# EAGLE board CT_schematic (EAGLE 7.6.0)

Size 100 x 80 mm. Coordinates in mm from the lower left corner, seen from the top.
Outline: 0,0 100,0 100,80 0,80 0,0
Copper layers (1*16): Top 0.035mm / dielectric 1.5mm / Bottom 0.035mm
Design rules "default": minimum track width 10mil, minimum drill 24mil, track to track 8mil, track to pad 8mil, pad to pad 8mil, via to via 8mil, smd to smd 8mil, copper to edge 40mil, drill to drill 8mil, minimum pad ring 10mil, minimum via ring 8mil, stop-mask expansion 4mil, vias tented up to drill 0mil, thermal gap 10mil

## Footprints (pad centres in the part's own frame; a part is rotated, then mirrored left to right if it is on the bottom)
C0603 = smd 0.8 x 0.8: 1 -0.762,0; 2 0.762,0
C0402 = smd 0.5 x 0.5: 1 -0.508,0; 2 0.508,0
C1210 = smd 1.2 x 2.5: 1 -1.524,0; 2 1.524,0
C0805 = smd 1.2 x 1.3: 1 -1.016,0; 2 1.016,0
C1206 = smd 1.3 x 1.6: 1 -1.524,0; 2 1.524,0
EXV-9H = smd 3.505 x 1.676: 1 -2.857,0; 2 2.857,0
L0603 = smd 0.8 x 0.8: 1 -0.762,0; 2 0.762,0
PJ-037B_PACKAGE = drill 3.7 square: 1 12,0 | drill 3.2 square: 2 6,0
R0603 = smd 0.8 x 0.8: 1 -0.762,0; 2 0.762,0
LQFP64 = smd 0.3 x 1.2: 1 -3.75,-5.75; 2 -3.25,-5.75; 3 -2.75,-5.75; 4 -2.25,-5.75; 5 -1.75,-5.75; 6 -1.25,-5.75; 7 -0.75,-5.75; 8 -0.25,-5.75; 9 0.25,-5.75; 10 0.75,-5.75; 11 1.25,-5.75; 12 1.75,-5.75; 13 2.25,-5.75; 14 2.75,-5.75; 15 3.25,-5.75; 16 3.75,-5.75; 33 3.75,5.75; 34 3.25,5.75; 35 2.75,5.75; 36 2.25,5.75; 37 1.75,5.75; 38 1.25,5.75; 39 0.75,5.75; 40 0.25,5.75; 41 -0.25,5.75; 42 -0.75,5.75; 43 -1.25,5.75; 44 -1.75,5.75; 45 -2.25,5.75; 46 -2.75,5.75; 47 -3.25,5.75; 48 -3.75,5.75 | smd 1.2 x 0.3: 17 5.75,-3.75; 18 5.75,-3.25; 19 5.75,-2.75; 20 5.75,-2.25; 21 5.75,-1.75; 22 5.75,-1.25; 23 5.75,-0.75; 24 5.75,-0.25; 25 5.75,0.25; 26 5.75,0.75; 27 5.75,1.25; 28 5.75,1.75; 29 5.75,2.25; 30 5.75,2.75; 31 5.75,3.25; 32 5.75,3.75; 49 -5.75,3.75; 50 -5.75,3.25; 51 -5.75,2.75; 52 -5.75,2.25; 53 -5.75,1.75; 54 -5.75,1.25; 55 -5.75,0.75; 56 -5.75,0.25; 57 -5.75,-0.25; 58 -5.75,-0.75; 59 -5.75,-1.25; 60 -5.75,-1.75; 61 -5.75,-2.25; 62 -5.75,-2.75; 63 -5.75,-3.25; 64 -5.75,-3.75
TST-110-05-T-D-RA = drill 1 pad 1.7 square: 1 0,0 | drill 1 pad 1.7: 2 0,2.54; 3 2.54,0; 4 2.54,2.54; 5 5.08,0; 6 5.08,2.54; 7 7.62,0; 8 7.62,2.54; 9 10.16,0; 10 10.16,2.54; 11 12.7,0; 12 12.7,2.54; 13 15.24,0; 14 15.24,2.54; 15 17.78,0; 16 17.78,2.54; 17 20.32,0; 18 20.32,2.54; 19 22.86,0; 20 22.86,2.54
QFN-28 = smd 0.813 x 0.305: 1 -2.451,1.5; 2 -2.451,1; 3 -2.451,0.5; 4 -2.451,0; 5 -2.451,-0.5; 6 -2.451,-1; 7 -2.451,-1.5; 15 2.451,-1.5; 16 2.451,-1; 17 2.451,-0.5; 18 2.451,0; 19 2.451,0.5; 20 2.451,1; 21 2.451,1.5 | smd 0.305 x 0.813: 8 -1.5,-2.451; 9 -1,-2.451; 10 -0.5,-2.451; 11 0,-2.451; 12 0.5,-2.451; 13 1,-2.451; 14 1.5,-2.451; 22 1.5,2.451; 23 1,2.451; 24 0.5,2.451; 25 0,2.451; 26 -0.5,2.451; 27 -1,2.451; 28 -1.5,2.451 | smd 3.607 x 3.607: 29 0,0
SJ-43515TS-SMT-TR = smd 2.2 x 3: 1 0.6,-7.4; 4 3.4,-7.4 | smd 3 x 3: 2 12.8,-7.4; 5 17,-3 | smd 2 x 3: 3 5.3,0; 6 2.5,0 | drill 1.8: P$7 4.5,-3.69; P$8 11.54,-3.69
ASEK = smd 1.4 x 1: 1 -1.1,-0.8; 2 1.1,-0.8; 3 1.1,0.8; 4 -1.1,0.8
ASFL1 = smd 1.7 x 1.5: 1 -1.27,-1.1; 2 1.27,-1.1; 3 1.27,1.1; 4 -1.27,1.1
WSON-8 = smd 0.3 x 0.6: 1 -0.75,0; 2 0.05,0; 3 0.85,0; 4 1.65,0; 5 1.65,3.8; 6 0.85,3.8; 7 0.05,3.8; 8 -0.75,3.8 | smd 3 x 2.6: PAD 0.45,1.9
SON-6 = smd 0.55 x 0.3: 1 -0.355,0.5 | smd 0.52 x 0.3: 2 -0.37,0; 3 -0.37,-0.5; 4 0.37,-0.5; 5 0.37,0; 6 0.37,0.5
SW_4-1437565-2 = smd 1.4 x 2.1: 1 -2.23,4.55; 2 -2.23,-4.55; 3 2.23,4.55; 4 2.23,-4.55
LGM67K-G1J2-24-Z = smd 0.8 x 1.4: A -2,0; C 0,0
NC7SZ125M5X = smd 1.3 x 0.7: 1 -1.3,0.95; 2 -1.3,0; 3 -1.3,-0.95; 4 1.3,-0.95; 5 1.3,0.95
DUMMY_PACKAGE_145 = drill 0.3: 1 0,-1; 2 1.5,-1; 3 3,-1

## Placement (x,y rotation side)
C1  1e-06  [C0603]  -53.34,62.23 0 top  (outside the outline)
C2  1e-07  [C0603]  -57.15,62.23 0 top  (outside the outline)
C3  1e-07  [C0603]  -60.96,62.23 0 top  (outside the outline)
C4  1e-07  [C0603]  -64.77,62.23 0 top  (outside the outline)
C5  1e-07  [C0603]  -68.58,62.23 0 top  (outside the outline)
C6  1e-07  [C0603]  -72.39,62.23 0 top  (outside the outline)
C7  4.7e-06  [C0603]  -49.53,62.23 0 top  (outside the outline)
C8  1e-08  [C0603]  -15.24,67.31 0 top  (outside the outline)
C9  1e-06  [C0603]  -19.05,67.31 0 top  (outside the outline)
C10  1e-07  [C0402]  -49.53,67.31 0 top  (outside the outline)
C11  2.2e-05  [C1210]  -59.69,49.53 0 top  (outside the outline)
C12  2.2e-05  [C1210]  -66.04,49.53 0 top  (outside the outline)
C13  1e-09  [C0402]  -53.34,67.31 0 top  (outside the outline)
C14  1e-09  [C0402]  -57.15,67.31 0 top  (outside the outline)
C15  1e-07  [C0402]  -60.96,67.31 0 top  (outside the outline)
C16  1e-07  [C0402]  -64.77,67.31 0 top  (outside the outline)
C17  1e-07  [C0402]  -68.58,67.31 0 top  (outside the outline)
C18  1e-07  [C0402]  -72.39,67.31 0 top  (outside the outline)
C19  1e-07  [C0402]  -15.24,72.39 0 top  (outside the outline)
C20  1e-05  [C0805]  -34.29,55.88 0 top  (outside the outline)
C21  1e-05  [C0805]  -39.37,55.88 0 top  (outside the outline)
C22  1e-05  [C0805]  -44.45,55.88 0 top  (outside the outline)
C23  1e-05  [C0805]  -49.53,55.88 0 top  (outside the outline)
C24  1e-05  [C0805]  -54.61,55.88 0 top  (outside the outline)
C25  1e-08  [C0402]  -19.05,72.39 0 top  (outside the outline)
C26  1e-08  [C0402]  -22.86,72.39 0 top  (outside the outline)
C27  1e-08  [C0402]  -26.67,72.39 0 top  (outside the outline)
C28  1e-08  [C0402]  -30.48,72.39 0 top  (outside the outline)
C29  1e-05  [C1206]  -16.51,55.88 0 top  (outside the outline)
C30  1e-05  [C1210]  -72.39,49.53 0 top  (outside the outline)
C31  1e-07  [C0402]  -34.29,72.39 0 top  (outside the outline)
C32  0.0001  [EXV-9H]  -17.78,49.53 0 top  (outside the outline)
C33  0.0001  [EXV-9H]  -29.21,49.53 0 top  (outside the outline)
C34  1e-08  [C0402]  -38.1,72.39 0 top  (outside the outline)
C35  1e-08  [C0402]  -41.91,72.39 0 top  (outside the outline)
F1  240.0  [L0603]  -22.86,67.31 0 top  (outside the outline)
J1  PJ-037B  [PJ-037B_PACKAGE]  -27.94,21.59 0 top  (outside the outline)
R2  1000.0  [R0603]  -26.67,67.31 0 top  (outside the outline)
R4  4700.0  [R0603]  -30.48,67.31 0 top  (outside the outline)
R5  10000.0  [R0603]  -15.24,62.23 0 top  (outside the outline)
R6  10000.0  [R0603]  -20.32,62.23 0 top  (outside the outline)
R7  47000.0  [R0603]  -25.4,62.23 0 top  (outside the outline)
R8  47000.0  [R0603]  -30.48,62.23 0 top  (outside the outline)
R9  47000.0  [R0603]  -35.56,62.23 0 top  (outside the outline)
R10  680.0  [R0603]  -34.29,67.31 0 top  (outside the outline)
R11  100000.0  [R0603]  -59.69,55.88 0 top  (outside the outline)
R12  2231.0  [R0603]  -38.1,67.31 0 top  (outside the outline)
R13  1000.0  [R0603]  -41.91,67.31 0 top  (outside the outline)
R14  10000.0  [R0603]  -40.64,62.23 0 top  (outside the outline)
R15  10000.0  [R0603]  -45.72,62.23 0 top  (outside the outline)
R16  9100.0  [R0603]  -45.72,67.31 0 top  (outside the outline)
R17  680000.0  [R0603]  -64.77,55.88 0 top  (outside the outline)
R18  120000.0  [R0603]  -69.85,55.88 0 top  (outside the outline)
U1  STM32F373RBT6  [LQFP64]  -40.64,21.59 0 top  (outside the outline)
U2  TST-110-05-T-D-RA  [TST-110-05-T-D-RA]  -46.99,39.37 0 top  (outside the outline)
U3  WM8731CLSEFL  [QFN-28]  -52.07,49.53 0 top  (outside the outline)
U4  SJ-43515TS-SMT-TR  [SJ-43515TS-SMT-TR]  -39.37,10.16 0 top  (outside the outline)
U5  SJ-43515TS-SMT-TR  [SJ-43515TS-SMT-TR]  -67.31,10.16 0 top  (outside the outline)
U6  ASEK-32.768KHz-ECST  [ASEK]  -66.04,41.91 0 top  (outside the outline)
U7  ASFL1-12.288MHZ-EC-T  [ASFL1]  -50.8,33.02 0 top  (outside the outline)
U8  ASFL1-25MHZ-NCS  [ASFL1]  -67.31,33.02 0 top  (outside the outline)
U9  LP3878SDX-ADJ/NOPB  [WSON-8]  -30.48,31.75 0 top  (outside the outline)
U10  TPS3895ADRYR  [SON-6]  -50.8,71.12 0 top  (outside the outline)
U11  4-1437565-2  [SW_4-1437565-2]  -62.23,21.59 0 top  (outside the outline)
U12  Q65110A2395  [LGM67K-G1J2-24-Z]  -39.37,49.53 0 top  (outside the outline)
U13  nc7sz125m5x  [NC7SZ125M5X]  -21.59,55.88 0 top  (outside the outline)
U14  nc7sz125m5x  [NC7SZ125M5X]  -27.94,55.88 0 top  (outside the outline)
U15  Dummy  [DUMMY_PACKAGE_145]  -48.26,72.39 0 top  (outside the outline)

## Library data of the parts
C1-C35 F1 J1 R2 R4-R18 U1-U15 = circuit_tree

## Nets
CLK_U1_3: U1.3 U6.3
CLK_U1_5: U1.5 U8.3
CLK_U3_1: U3.1 U7.3
GND: C1.2 C2.2 C3.2 C4.2 C5.2 C6.2 C7.2 C8.2 C9.2 C10.2 C14.2 C15.2 C16.2 C17.2 C18.2 C19.2 C20.2 C21.2 C22.2 C23.2 C24.2 C25.2 C26.2 C27.2 C28.2 C29.2 C30.2 C31.2 C32.2 C33.2 C34.2 C35.2 J1.2 R2.2 R5.2 R7.2 R8.2 R9.2 R13.2 R16.2 R18.2 U1.12 U1.31 U1.63 U2.4 U2.6 U2.8 U2.10 U2.12 U2.14 U2.16 U2.18 U2.20 U3.4 U3.15 U3.19 U3.25 U3.26 U3.29 U4.1 U5.1 U6.2 U7.2 U8.2 U9.3 U9.PAD U10.2 U12.C U13.2 U13.3 U14.1 U14.3 U15.1
NET_U1_7: R4.1 U1.7 U14.4
NET_U1_13: C8.1 C9.1 F1.1 U1.13 U1.17
NET_U1_32: U1.32
NET_U1_33: U1.33
NET_U1_60: R5.1 U1.60
NET_U1_61: U12.A
NET_U1_62: U11.3 U11.4
NET_U3_9: U3.9
NET_U3_20: C19.1 C24.1 U3.20
NET_U4_2: C12.1 R8.1 U4.2
NET_U4_5: C11.1 R7.1 U4.5
NET_U4_13: C11.2
NET_U4_14: C12.2
NET_U5_5: C13.1 C14.1 R9.1 R10.1 U5.5
NET_U5_21: R10.2
NET_U5_22: C13.2
NET_U9_1: C28.1 U9.1
NET_U9_6: R12.2 R13.1 U9.6
NET_U9_8: R11.1 U9.8
NET_U10_1: R15.1 R16.1 U10.1
NET_U10_3: R17.2 R18.1 U10.3
NET_U10_4: R14.1 U10.4 U13.4 U14.2
NET_U11_1: R2.1 U11.1 U11.2
PROC_ADC1_IN1: U1.15 U15.3
PROC_ADC1_IN2: U1.16 U15.2
PROC_I2S1_CK: U1.21 U3.7
PROC_I2S1_SD: U1.23 U3.8
PROC_I2S1_WS: U1.20 U3.9 U3.11
PROC_SYS_JTCK_SWCLK: U1.49 U2.9
PROC_SYS_JTDO_TRACESWO: U1.55 U2.13
PROC_SYS_JTMS_SWDIO: U1.46 U2.7
RST_OUT_U2_SRESET_B: R6.1 U2.15 U13.1
VCC_S1_6V3: C29.1 C32.1 C33.1 J1.1 R11.2 U9.4
VCC_TIER1_3V3: C1.1 C2.1 C3.1 C4.1 C5.1 C6.1 C7.1 C10.1 C15.1 C16.1 C17.1 C18.1 C20.1 C21.1 C22.1 C23.1 C25.1 C26.1 C27.1 C30.1 C31.1 C34.1 C35.1 F1.2 R4.2 R6.2 R12.1 R14.2 R15.2 R17.1 U1.1 U1.19 U1.64 U2.1 U3.3 U3.5 U3.12 U3.18 U6.4 U7.4 U8.4 U9.5 U10.6 U13.5 U14.5

## Tracks (layer width: path | path; a pad name or v marks a point on that pad's centre or on a via)
CLK_U1_3  (1 unrouted)
CLK_U1_5  (1 unrouted)
CLK_U3_1  (1 unrouted)
GND  (72 unrouted)
NET_U1_7  (2 unrouted)
NET_U1_13  (4 unrouted)
NET_U1_60  (1 unrouted)
NET_U1_62  (1 unrouted)
NET_U3_20  (2 unrouted)
NET_U4_2  (2 unrouted)
NET_U4_5  (2 unrouted)
NET_U5_5  (4 unrouted)
NET_U9_1  (1 unrouted)
NET_U9_6  (2 unrouted)
NET_U9_8  (1 unrouted)
NET_U10_1  (2 unrouted)
NET_U10_3  (2 unrouted)
NET_U10_4  (3 unrouted)
NET_U11_1  (2 unrouted)
PROC_ADC1_IN1  (1 unrouted)
PROC_ADC1_IN2  (1 unrouted)
PROC_I2S1_CK  (1 unrouted)
PROC_I2S1_SD  (1 unrouted)
PROC_I2S1_WS  (2 unrouted)
PROC_SYS_JTCK_SWCLK  (1 unrouted)
PROC_SYS_JTDO_TRACESWO  (1 unrouted)
PROC_SYS_JTMS_SWDIO  (1 unrouted)
RST_OUT_U2_SRESET_B  (2 unrouted)
VCC_S1_6V3  (5 unrouted)
VCC_TIER1_3V3  (44 unrouted)